# Altium PCB ChangingMelodiesShield.PcbDoc
Units mm, origin at the board's own origin, x right, y up, seen from the top; angles counter-clockwise.
Board outline 64.99 x 56 mm, 2 copper layers (Top Layer, Bottom Layer), stack 1.554 mm thick; 62 components, 58 nets, 212 pads, 51 vias.
Unrouted connection lines stored in the file: 1.
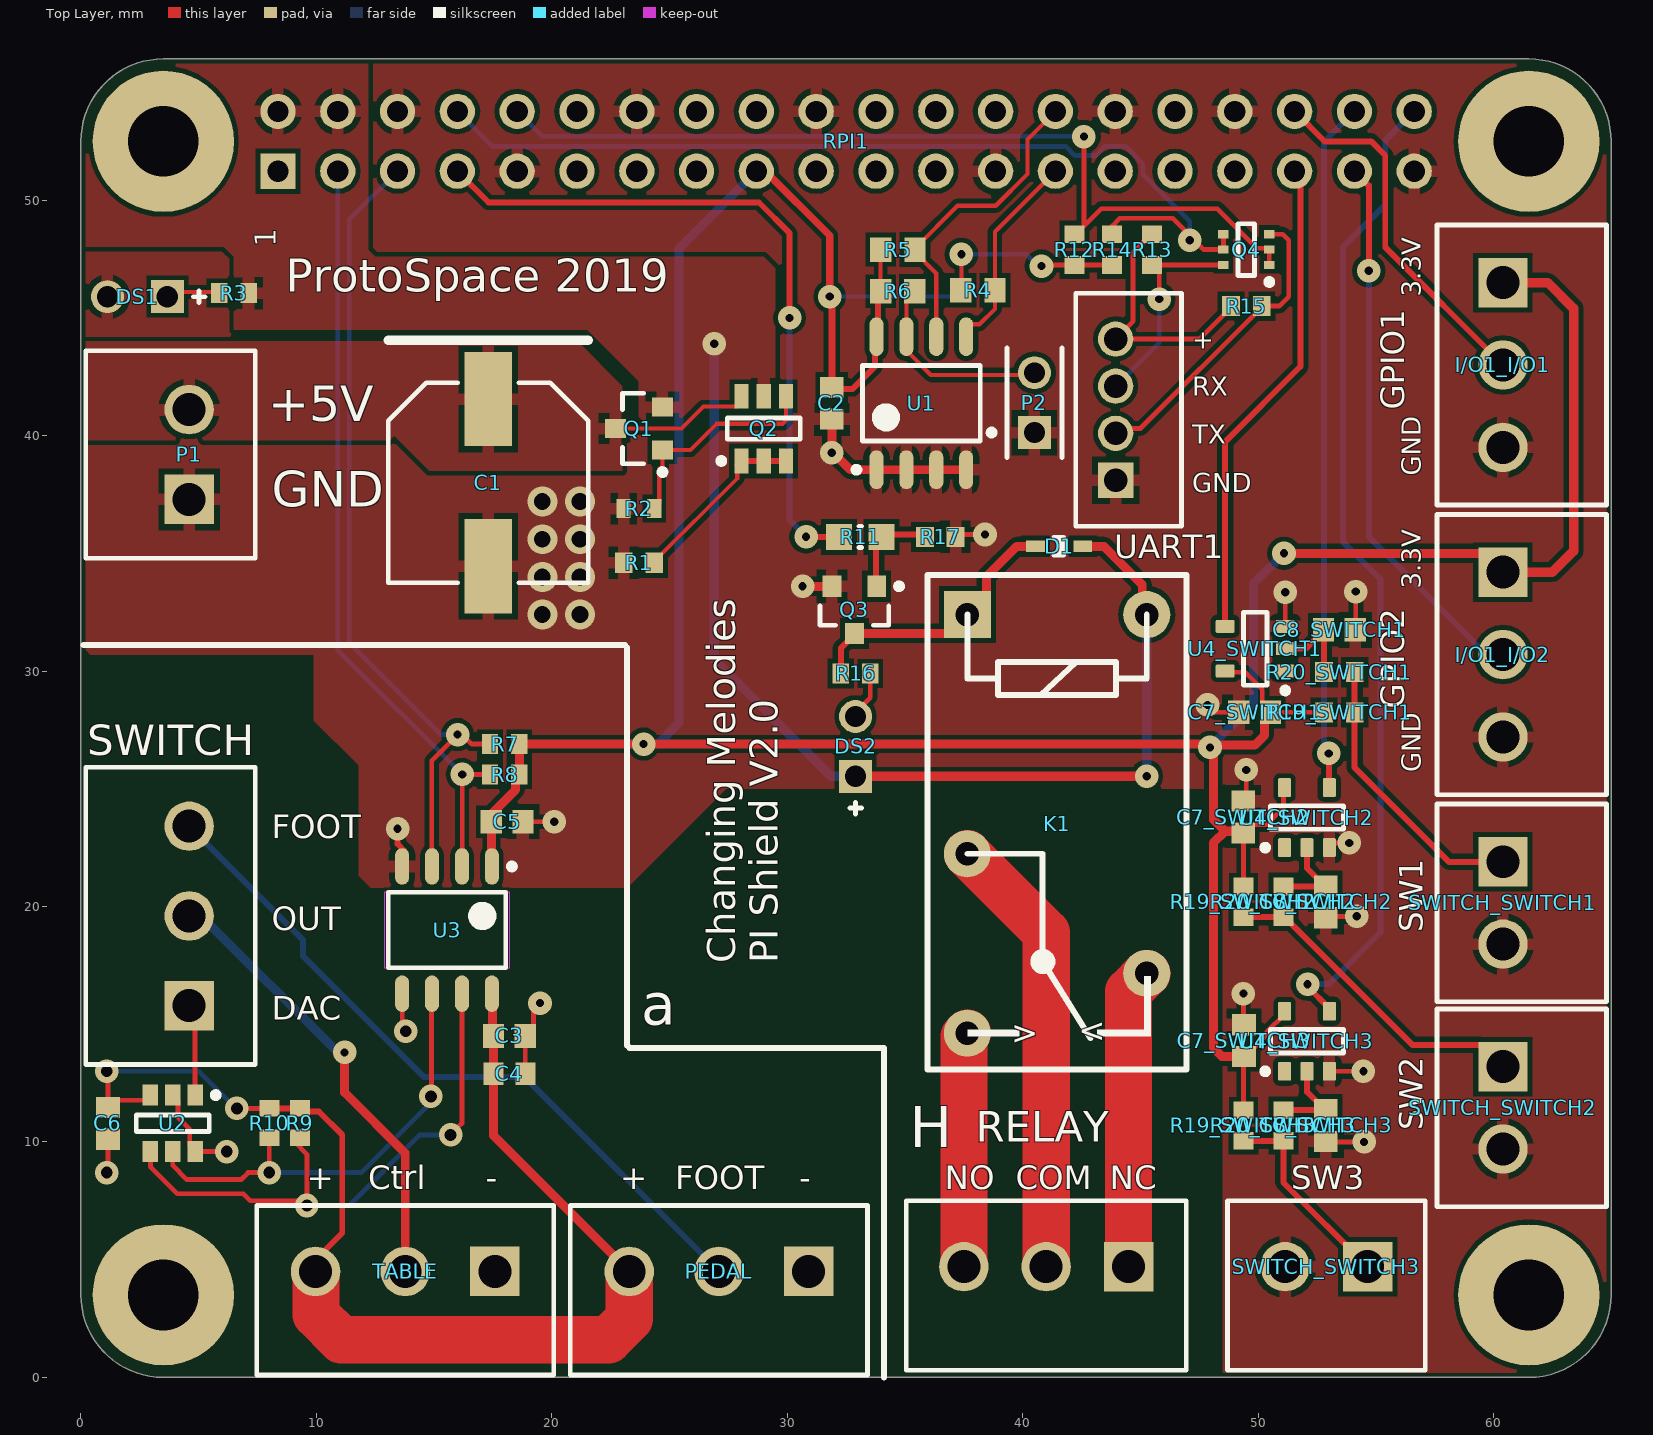
[diagram p0: Top Layer view]
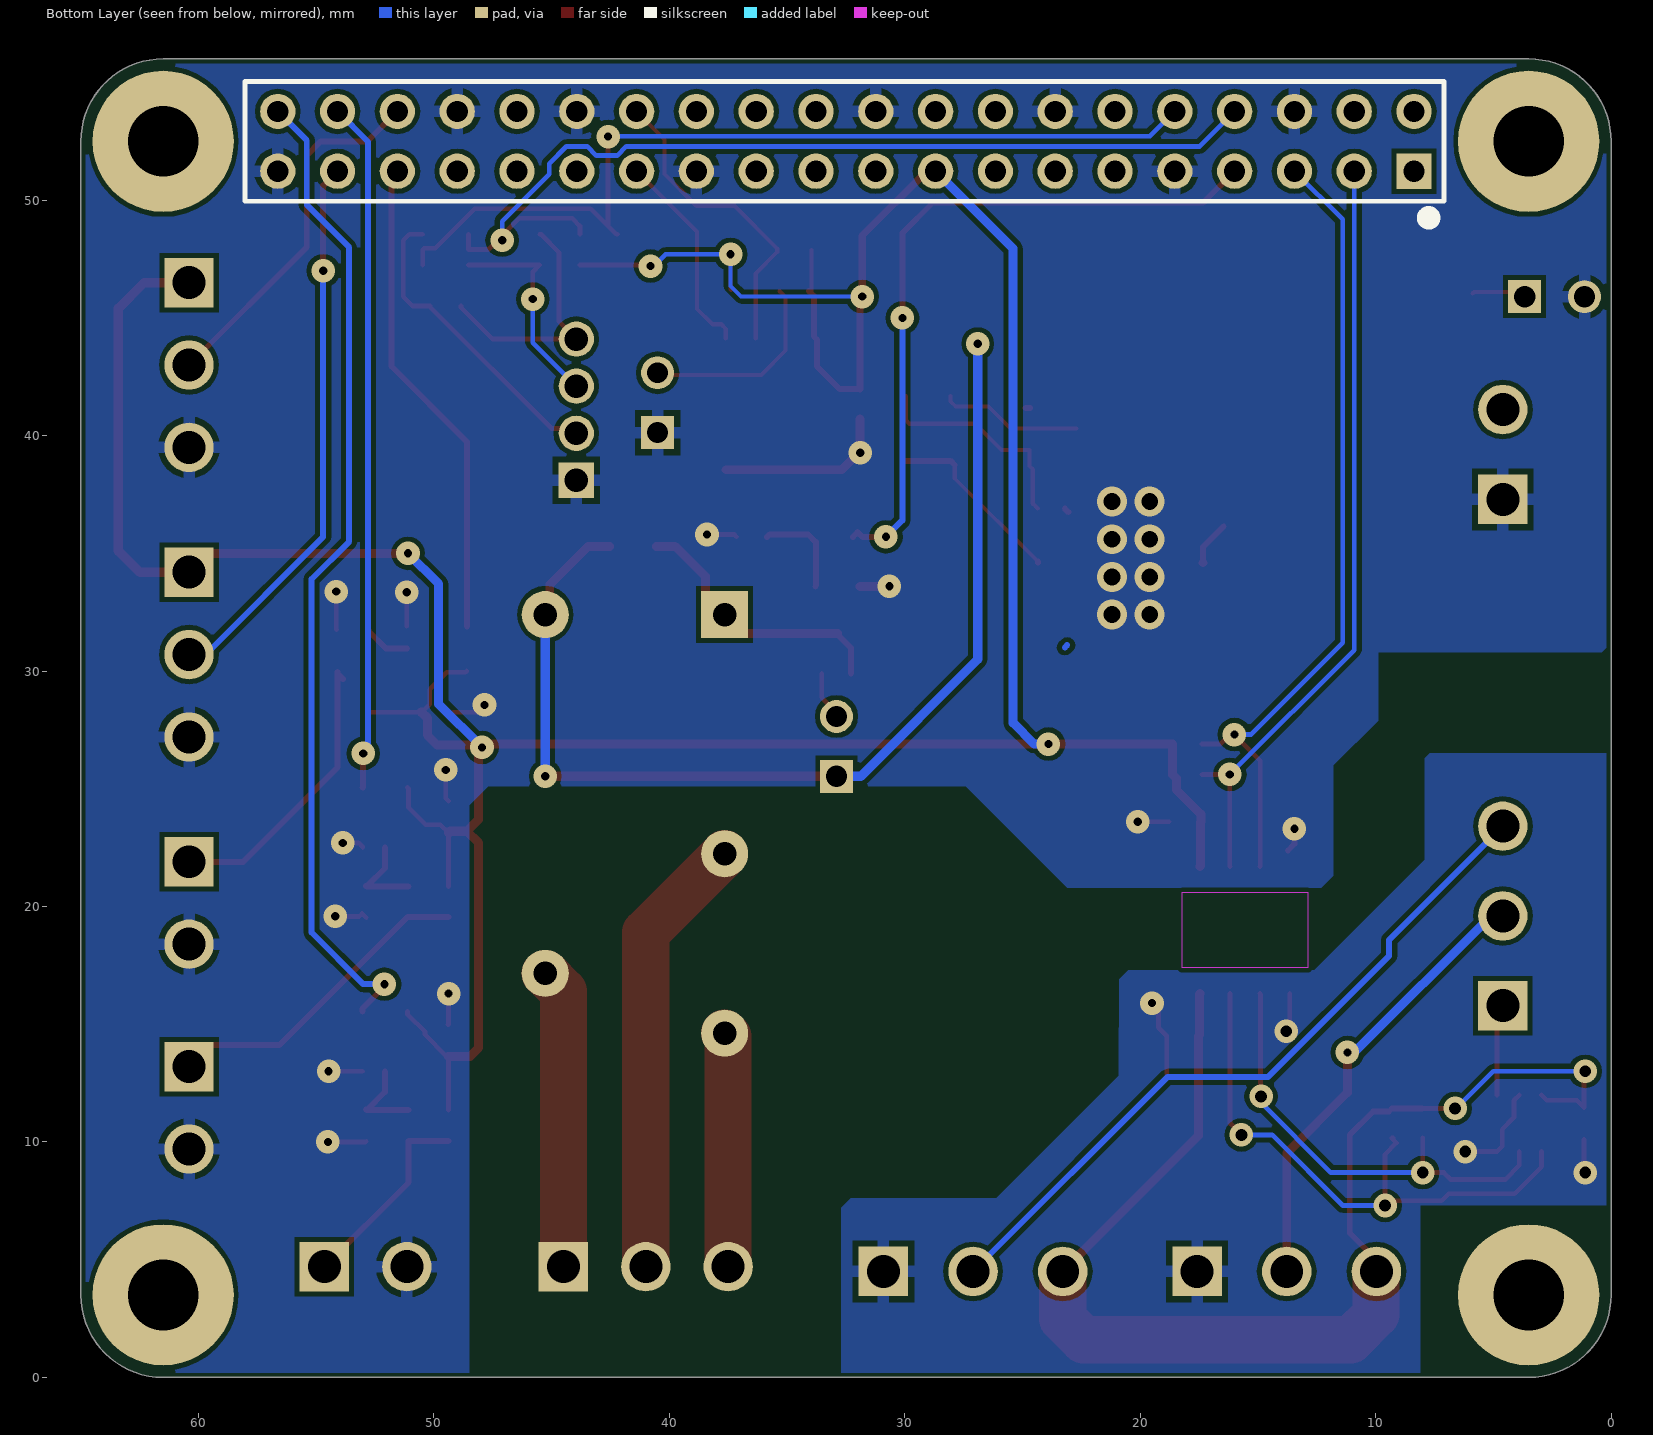
[diagram p1: Bottom Layer view, seen from below]

## Layer stack, top to bottom
Top Solder: solder mask 0.0203, Solder Resist, Dk 3.5
Top Layer: signal copper 0.0533
Dielectric 1: dielectric 1.4478, FR-4, Dk 4.6
Bottom Layer: signal copper 0.0533
Bottom Solder: solder mask 0.0203, Solder Resist, Dk 3.5

## Board outline
0,3.5 ccw(c3.5,3.5) 3.5,0 61.5,0 ccw(c61.496,3.496) 64.992,3.5 64.992,52.5 ccw(c61.496,52.504) 61.5,56 3.5,56 ccw(c3.5,52.5) 0,52.5

## Design rules (kind name [scope] priority, off if disabled: settings)
BoardOutlineClearance [All] p1: gap=0.2 ignorepadtopadclearanceinfootprint=FALSE except(0.4: Arc-SplitBarrior Arc-SplitContinuation Track-SplitBarrior Track-SplitContinuation SMDPad-SplitBarrior SMDPad-SplitContinuation THPad-SplitBarrior THPad-SplitContinuation Via-SplitBarrior Via-SplitContinuation Fill-SplitBarrior Fill-SplitContinuation Poly-SplitBarrior Poly-SplitContinuation Region-SplitBarrior Region-SplitContinuation Text-SplitBarrior Text-SplitContinuation)
Clearance "Clearance Bottom Layer" [OnLayer('Bottom Layer')] p1: gap=0.203 ignorepadtopadclearanceinfootprint=TRUE except(0.254: Arc-Text Track-Text SMDPad-Text THPad-Text Via-Text Fill-Text Poly-Text Region-Text Text-Text)
Clearance "Clearance Top Layer" [OnLayer('Top Layer')] p2: gap=0.203 ignorepadtopadclearanceinfootprint=TRUE except(0.254: Arc-Text Track-Text SMDPad-Text THPad-Text Via-Text Fill-Text Poly-Text Region-Text Text-Text)
Clearance [All] p3: gap=0.2 ignorepadtopadclearanceinfootprint=FALSE except(0.089: Arc-Arc Arc-Track Arc-SMDPad Track-Track Track-SMDPad SMDPad-SMDPad; 0.127: Arc-Via Track-Via SMDPad-Via THPad-Via Via-Via; 0.254: Arc-Text Track-Text SMDPad-Text THPad-Text Via-Text Fill-Text Poly-Text Region-Text Text-Text)
HoleSize [All] p1: absolutevalues=TRUE maxlimit=6.3 minlimit=0.2 maxpercent=80.000 minpercent=20.000
MinimumAnnularRing [All] p1: minimumring=0.076
MinimumSolderMaskSliver [All] p1: minsoldermaskwidth=0.1
PolygonConnect PolygonConnect_1 [All] p1: thpad.connectstyle=Relief thpad.reliefconductorwidth=0.508 thpad.reliefentries=4 thpad.polygonreliefangle="90 Angle" thpad.airgapwidth=0.254 smdpad.connectstyle=Relief smdpad.reliefconductorwidth=0.508 smdpad.reliefentries=4 smdpad.polygonreliefangle="90 Angle" smdpad.airgapwidth=0.254 via.connectstyle=Direct via.reliefconductorwidth=0.508 via.reliefentries=4 via.polygonreliefangle="90 Angle" via.airgapwidth=0.254
RoomDefinition I/O2 [InComponentClass('I/O2')] p1: confinementstyle=ConfineIn formatcopy=TRUE lockcomponents=FALSE outline 65.3,37.2 57.3,37.2 57.3,24.3 65.3,24.3
RoomDefinition I/O1 [InComponentClass('I/O1')] p2: confinementstyle=ConfineIn formatcopy=TRUE lockcomponents=FALSE outline 65.3,49.3 57.2,49.3 57.2,36.8 65.3,36.8
RoomDefinition SWITCH3 [InComponentClass('SWITCH3')] p3: confinementstyle=ConfineIn formatcopy=TRUE lockcomponents=FALSE outline 57.675,-0.08 57.675,18.6 48,18.6 48,0
RoomDefinition SWITCH1 [InComponentClass('SWITCH1')] p4: confinementstyle=ConfineIn formatcopy=TRUE lockcomponents=FALSE outline 65.1,34.2 47.7,34.2 47.7,15.7 65.1,15.7
RoomDefinition SWITCH2 [InComponentClass('SWITCH2')] p5: confinementstyle=ConfineIn formatcopy=TRUE lockcomponents=FALSE outline 65.1,7 65.1,26.9 47.975,26.9 47.975,7
RoomDefinition U_UART [InComponentClass('U_UART')] p6: confinementstyle=ConfineIn formatcopy=TRUE lockcomponents=FALSE outline 41.1,34.2 57,34.2 57,49.7 41.1,49.7
RoomDefinition "U_Relay Output" [InComponentClass('U_Relay Output')] p7: confinementstyle=ConfineIn formatcopy=TRUE lockcomponents=FALSE outline 30.6,0 47.65,0 47.65,36.8 30.6,36.8
RoomDefinition "U_Isolated DAC" [InComponentClass('U_Isolated DAC')] p8: confinementstyle=ConfineIn formatcopy=TRUE lockcomponents=FALSE outline 33.9,31.2 33.9,-0.1 0,-0.1 0,31.2
RoomDefinition "U_Output terminals" [InComponentClass('U_Output terminals')] p9 off: confinementstyle=ConfineOut formatcopy=TRUE lockcomponents=FALSE outline -0.3,72.9 31.7,72.9 31.7,80.8 -0.3,80.8
RoomDefinition "U_RPI 3 Backpower" [InComponentClass('U_RPI 3 Backpower')] p10: confinementstyle=ConfineIn formatcopy=TRUE lockcomponents=FALSE outline -0.1,31.5 30.9,31.5 30.9,48.1 -0.1,48.1
RoomDefinition "U_RPI Hat ID" [InComponentClass('U_RPI Hat ID')] p11: confinementstyle=ConfineIn formatcopy=TRUE lockcomponents=FALSE outline 42.795,36.985 42.795,49.575 31.095,49.575 31.095,36.985
RoomDefinition "U_RPI 3" [InComponentClass('U_RPI 3')] p12: confinementstyle=ConfineIn formatcopy=TRUE lockcomponents=FALSE outline 6.8,49.7 58.3,49.7 58.3,55.4 6.8,55.4
RoutingCorners [All] p1: cornerstyle=Round minsetback=2.54 maxsetback=2.54
RoutingTopology "GND Topology" [InNetClass('GND')] p1: topology=Starburst
RoutingTopology [All] p2: topology=Shortest
RoutingVias [All] p1: holewidth=0.5 width=1 viastyle="Through Hole" minholewidth=0.2 minwidth=0.45 maxholewidth=1 maxwidth=2
SilkToSilkClearance [All] p1: silktosilkclearance=0.1
SilkToSolderMaskClearance [IsPad] p1: minsilkscreentomaskgap=0.1 clearancetoexposedcopper=TRUE
SolderMaskExpansion [All] p1: expansion=0.102
Width [All] p1: maxlimit=2.54 minlimit=0.089 preferedwidth=0.381
24 further rules are at their usual default settings.

## Classes and differential pairs
channel class GPIO: I/O1 I/O2
net class I/O[1..2]: I/O1 I/O2
component class I/O2: I/O1_I/O2
component class I/O1: I/O1_I/O1
net class SWITCH[1..3]: SWITCH1 SWITCH2 SWITCH3
channel class Switch: SWITCH1 SWITCH2 SWITCH3
component class SWITCH3: C7_SWITCH3 C8_SWITCH3 R19_SWITCH3 R20_SWITCH3 SWITCH_SWITCH3 U4_SWITCH3
component class SWITCH2: C7_SWITCH2 C8_SWITCH2 R19_SWITCH2 R20_SWITCH2 SWITCH_SWITCH2 U4_SWITCH2
component class SWITCH1: C7_SWITCH1 C8_SWITCH1 R19_SWITCH1 R20_SWITCH1 SWITCH_SWITCH1 U4_SWITCH1
component class U_UART: Q4 R12 R13 R14 R15
component class "U_Relay Output": D1 DS2 K1 Q3 R11 R16 R17
component class "U_Output terminals": PEDAL RELAY SWITCH TABLE UART1
component class "U_RPI 3 Backpower": C1 DS1 P1 Q1 Q2 R1 R2 R3
component class "U_Isolated DAC": C3 C4 C5 C6 R7 R8 R9 R10 U2 U3
component class "U_RPI Hat ID": C2 P2 prog R4 R5 R6 U1
component class "U_RPI 3": RPI1

## Components (designator, comment, footprint, x,y, rotation, side; value= is the part's Value field where it differs from the comment)
C1 "EEEFK1C471P" PNSC-FK-V-F_V 17.3,38 r270 top
C2 "0.1uF" CAPC1608X87X35NL15T15 31.895,41.375 r270 top
C3 "0.1uF" CAPC1608X87X35NL15T15 18.2,14.5 r0 top
C4 "10uF" CAPC1608X90X35NL10T15 18.2,12.9 r180 top
C5 "0.1uF" CAPC1608X87X35NL15T15 18.1,23.6 r0 top
C6 "0.1uF" CAPC1608X87X35NL15T15 1.15,10.79 r270 top
C7_SWITCH1 "0.1uF" CAPC1608X87X35NL15T15 49.85,28.25 r180 top (schematic designator C7)
C7_SWITCH2 "0.1uF" CAPC1608X87X35NL15T15 49.375,23.8 r90 top (schematic designator C7)
C7_SWITCH3 "0.1uF" CAPC1608X87X35NL15T15 49.4,14.3 r90 top (schematic designator C7)
C8_SWITCH1 "0.1uF" CAPC1608X87X35NL15T15 53.45,31.75 r0 top (schematic designator C8)
C8_SWITCH2 "0.1uF" CAPC1608X87X35NL15T15 52.875,20.2 r270 top (schematic designator C8)
C8_SWITCH3 "0.1uF" CAPC1608X87X35NL15T15 52.875,10.7 r270 top (schematic designator C8)
D1 "1N4148WT" FAIR-SOD-523F-2_V 41.55,35.3 r180 top
DS1 "LTL-1CHG" LTST-LTL-1CHG-2 2.4,45.9 r180 top
DS2 "LTL-1CHG" LTST-LTL-1CHG-2 32.9,26.8 r90 top
I/O1_I/O1 "691321100003" 691321100003 61.2,43 r270 top (schematic designator I/O1)
I/O1_I/O2 "691321100003" 691321100003 61.2,30.7 r270 top (schematic designator I/O1)
K1 "G5Q1EU5DC" G5Q1EU5DC 37.65,32.4 r180 top
P1 "691321300002" 691321300002 3.8,39.2 r90 top
P2 "5-146280-2" TECO-5-146280-2_V 40.5,41.4 r90 top
PEDAL "691321300003" 691321300003 27.1,3.7 r180 top
Q1 "DMG2305UX-7" DIOD-SOT23-3_A_V 23.7,40.3 r180 top
Q2 "DMMT5401-7-F" DIOD-SOT-26-6_N 29,40.3 r90 top
Q3 "BC848ALT1G" ONSC-SOT-23-3-318-08_V 32.85,32.6 r270 top
Q4 "BSS138BKS,115" NXP-SOT363_L 49.5,47.9 r180 top
R1 "10k" RESC1609X55X30LL15T15 23.7,34.6 r0 top
R2 "47k" RESC1608X55X25LL10T15 23.7,36.9 r0 top
R3 "1K" RESC1608X55X30LL15T15 6.5,46.05 r0 top
R4 "3.9K" RESC1608X55X30ML15T15 38.095,46.175 r180 top
R5 "3.9K" RESC1608X55X30ML15T15 34.7,47.9 r180 top
R6 "1K" RESC1608X55X30ML15T15 34.695,46.135 r180 top
R7 "1K" RESC1608X55X30LL15T15 18,26.9 r0 top
R8 "1K" RESC1608X55X30LL15T15 18,25.6 r0 top
R9 "1K" RESC1608X55X30LL15T15 9.3,10.8 r90 top
R10 "1K" RESC1608X55X30LL15T15 8,10.8 r90 top
R11 "470R" RESC0603(1608)_M 33.1,35.7 r0 top value="470.00 Ohm"
R12 "10k" RESC1609X55X30LL15T15 42.2,47.9 r270 top
R13 "10k" RESC1609X55X30LL15T15 45.5,47.9 r270 top
R14 "10k" RESC1609X55X30LL15T15 43.8,47.9 r270 top
R15 "10k" RESC1609X55X30LL15T15 49.5,45.5 r180 top
R16 "1K" RESC1608X55X30LL15T15 32.9,29.9 r0 top
R17 "10k" RESC1609X55X30LL15T15 36.5,35.7 r180 top
R19_SWITCH1 "10k" RESC1609X55X30LL15T15 53.45,28.25 r180 top (schematic designator R19)
R19_SWITCH2 "10k" RESC1609X55X30LL15T15 49.375,20.2 r90 top (schematic designator R19)
R19_SWITCH3 "10k" RESC1609X55X30LL15T15 49.375,10.7 r90 top (schematic designator R19)
R20_SWITCH1 "10k" RESC1609X55X30LL15T15 53.45,29.95 r0 top (schematic designator R20)
R20_SWITCH2 "10k" RESC1609X55X30LL15T15 51.075,20.2 r270 top (schematic designator R20)
R20_SWITCH3 "10k" RESC1609X55X30LL15T15 51.075,10.7 r270 top (schematic designator R20)
RELAY "691321100003" 691321100003 41,3.9 r180 top
RPI1 "RPI GPIO Connector" RPI 32.5,52.5 r180 top locked
SWITCH "691321300003" 691321300003 3.8,19.6 r90 top
SWITCH_SWITCH1 "691321100003" 691321100002 61.2,20.15 r270 top (schematic designator SWITCH)
SWITCH_SWITCH2 "691321100003" 691321100002 61.2,11.45 r270 top (schematic designator SWITCH)
SWITCH_SWITCH3 "691321100003" 691321100002 52.9,3.9 r180 top (schematic designator SWITCH)
TABLE "691321300003" 691321300003 13.776,3.7 r180 top
U1 "M24C02-WMN6TP" STM-M24C02-WMN6TP-8_M 35.695,41.375 r90 top
U2 "MCP4725A0T-E/CH" SOT-23-CH6_L 3.9,10.79 r270 top
U3 "ISO1540DR" "ISO1540DR SOIC127P600X175-8N" 15.55,19 r270 top
U4_SWITCH1 "SN74AHC1G14DBVR" DBV0005A_L 49.875,30.95 r180 top (schematic designator U4)
U4_SWITCH2 "SN74AHC1G14DBVR" DBV0005A_L 52.075,23.775 r90 top (schematic designator U4)
U4_SWITCH3 "SN74AHC1G14DBVR" DBV0005A_L 52.075,14.275 r90 top (schematic designator U4)
UART1 "B4B-PH-K-S(LF)(SN)" JST-B4B-PH-K-S_V 44.5,41.1 r90 top

## Footprints (in the part's own frame and the unit in brackets; to place one, negate y for a bottom-side part, rotate by r counter-clockwise, add the part's x,y. Pads: shape width x height; smd on the part's side, far side on the other; paste and mask are expansions set on the pad)
691321100002 [mm] "Vertical PCB Header, pitch 3.5mm, 02p"
  rect 2.1x2.1 hole 1.4: 1(-1.75,-0.8)
  round 2.1 hole 1.4: 2(1.75,-0.8)
  silkscreen extent -4.2,-3.6 4.2,3.6, body extent -4.2,-3.6 4.2,3.6, height 9.3
691321100003 [mm] "Vertical PCB Header, pitch 3.5mm, 03p"
  rect 2.1x2.1 hole 1.4: 1(-3.5,-0.8)
  round 2.1 hole 1.4: 2(0,-0.8) 3(3.5,-0.8)
  silkscreen extent -5.95,-3.6 5.95,3.6, body extent -5.95,-3.6 5.95,3.6, height 9.3
691321300002 [mm] "Vertical PCB Header, pitch 3.81mm, 02p"
  rect 2.1x2.1 hole 1.4: 1(-1.905,-0.8)
  round 2.1 hole 1.4: 2(1.905,-0.8)
  silkscreen extent -4.4,-3.6 4.41,3.6, body extent -4.4,-3.6 4.41,3.6, height 9.25
691321300003 [mm] "Vertical PCB Header, pitch 3.81mm, 03p"
  rect 2.1x2.1 hole 1.4: 1(-3.81,-0.8)
  round 2.1 hole 1.4: 2(0,-0.8) 3(3.81,-0.8)
  silkscreen extent -6.31,-3.6 6.31,3.6, body extent -6.31,-3.6 6.31,3.6, height 9.25
CAPC1608X87X35NL15T15 [mm] "Chip Capacitor, 2-Leads, Body 1.60x0.80mm, IPC Medium Density"
  rect 0.9x1 smd: 1(-0.675,0) 2(0.675,0)
  body extent -0.87,-0.48 0.87,0.47, height 0.87
CAPC1608X90X35NL10T15 [mm] "Chip Capacitor, 2-Leads, Body 1.60x0.80mm, IPC Medium Density"
  rect 0.85x0.95 smd: 1(-0.675,0) 2(0.675,0)
  body extent -0.85,-0.45 0.85,0.45, height 0.9
DBV0005A_L [mm] "SOT23, 5-Leads, Body 3.05x1.75mm, Pitch 0.95mm, IPC High Density"
  rrect18% 0.8x0.55 smd: 1(-1.275,0.95) 2(-1.275,0) 3(-1.275,-0.95) 4(1.275,-0.95) 5(1.275,0.95)
  silkscreen extent -1.4,-1.55 0.5,1.9, body extent -1.42,-1.46 1.42,1.46, height 1.08
DIOD-SOT23-3_A_V [mm] "SOT23, 3-Leads, Body 3x1.40mm, Pitch 0.915mm"
  rect 0.9x0.8 smd: 1(-1,0.915) 2(-1,-0.915) 3(1,0)
  silkscreen extent -1.13,-1.5 0.7,1.97, body extent -1.25,-1.5 1.25,1.5, height 1.1
DIOD-SOT-26-6_N [mm] "SOT23, 6-Leads, Body 3.1x1.7mm, Pitch 0.95mm, IPC Medium Density"
  rect 1.05x0.6 smd: 1(-1.375,0.95) 2(-1.375,0) 3(-1.375,-0.95) 4(1.375,-0.95) 5(1.375,0) 6(1.375,0.95)
  silkscreen extent -1.5,-1.55 0.45,1.92, body extent -1.5,-1.55 1.5,1.55, height 1.36
FAIR-SOD-523F-2_V [mm] "SMD, 2-Leads, Body 1.2x0.8mm, Height 0.7mm"
  rect 0.8x0.5 smd: 1(-1,0) 2(1,0)
  silkscreen extent -0.2,-0.38 0.24,0.38, body extent -0.6,-0.4 0.6,0.4, height 0.71
G5Q1EU5DC [mm] "OMRON - G5Q-1EU 5DC - RELAY, SPDT, 250VAC, 30VDC, 10A"
  rect 2x2 hole 1: 1(0,0)
  round 2 hole 1: 2(0,10.16) 3(0,17.78) 4(-7.62,15.24) 5(-7.62,0)
  silkscreen extent -9.31,-1.68 1.69,19.32, body extent -8.81,-1.18 1.19,18.82, height 16.2
"ISO1540DR SOIC127P600X175-8N" [mm] "SOIC, 8-Leads, Body 4,91x3,90mm, Pitch 1,27mm, IPC Medium Density"
  oval 1.55x0.6 smd: 1(-2.7,1.905) 2(-2.7,0.635) 3(-2.7,-0.635) 4(-2.7,-1.905) 5(2.7,-1.905) 6(2.7,-0.635) 7(2.7,0.635) 8(2.7,1.905)
  Top Layer keep-out region: -1.6,-2.667 1.6,-2.667 1.6,2.667 -1.6,2.667
  Bottom Layer keep-out region: -1.6,-2.667 1.6,-2.667 1.6,2.667 -1.6,2.667
  silkscreen extent -2.82,-2.5 1.6,2.88, body extent -3,-2.5 3,2.5, height 1.75
JST-B4B-PH-K-S_V [mm] "Connector, 4-Leads, Body 9.9x4.5mm, Pitch 2mm"
  rect 1.5x1.5 hole 1: 1(-3,0.55)
  round 1.5 hole 1: 2(-1,0.55) 3(1,0.55) 4(3,0.55)
  silkscreen extent -4.95,-2.25 4.95,2.25, body extent -4.95,-2.25 4.95,2.25, height 6
LTST-LTL-1CHG-2 [mm] "TH, 2-Leads, Dia 3.8mm"
  rect 1.4x1.4 hole 0.9: 1(-1.27,0)
  round 1.4 hole 0.9: 2(1.27,0)
  silkscreen extent -2.87,-0.25 -2.37,0.25, body extent -1.9,-1.9 1.9,1.9, height 6.5
NXP-SOT363_L [mm] "SOT23, 6-Leads, Body 2.2x1.35mm, Pitch 0.65mm, IPC High Density"
  rect 0.45x0.35 smd: 1(-0.975,0.65) 2(-0.975,0) 3(-0.975,-0.65) 4(0.975,-0.65) 5(0.975,0) 6(0.975,0.65)
  silkscreen extent -1.1,-1.1 0.35,1.5, body extent -0.67,-1.1 0.67,1.1, height 1.1
ONSC-SOT-23-3-318-08_V [mm] "SOT23, 3-Leads, Body 2.92x1.3mm, Pitch 0.95mm"
  rect 0.9x0.8 smd: 1(-1,0.95) 2(-1,-0.95) 3(1,0)
  silkscreen extent -1.12,-1.46 0.65,2.03, body extent -0.65,-1.46 0.65,1.46, height 1.11
PNSC-FK-V-F_V [mm] "CAPAE, 2-Leads, Body 8.50x8.50mm"
  rect 4x2 smd: 1(-3.55,0) 2(3.55,0)
  silkscreen extent -6.05,-4.25 4.25,4.25, body extent -5,-4.25 5,4.25, height 10.5
RESC0603(1608)_M [mm] "Chip Resistor, Body 1.6x0.8mm, IPC Low Density"
  rect 1.1x1.1 smd: 1(-0.9,0) 2(0.9,0)
  silkscreen extent -0.05,-0.45 0.05,0.45, body extent -0.85,-0.47 0.85,0.47, height 0.6
RESC1608X55X25LL10T15 [mm] "Chip Resistor, 2-Leads, Body 1.60x0.80mm, IPC High Density"
  rect 0.6x0.8 smd: 1(-0.65,0) 2(0.65,0)
  body extent -0.85,-0.45 0.85,0.45, height 0.55
RESC1608X55X30LL15T15 [mm] "Chip Resistor, 2-Leads, Body 1.60x0.80mm, IPC High Density"
  rect 0.7x0.85 smd: 1(-0.625,0) 2(0.625,0)
  body extent -0.87,-0.48 0.87,0.48, height 0.55
RESC1608X55X30ML15T15 [mm] "Chip Resistor, 2-Leads, Body 1.60x0.80mm, IPC Low Density"
  rect 0.9x1.05 smd: 1(-0.725,0) 2(0.725,0)
  body extent -0.87,-0.48 0.87,0.48, height 0.55
RESC1609X55X30LL15T15 [mm] "Chip Resistor, 2-Leads, Body 1.75x0.95mm, IPC High Density"
  rect 0.75x0.85 smd: 1(-0.65,0) 2(0.65,0)
  body extent -0.87,-0.48 0.87,0.48, height 0.55
RPI [mm]
  rect 1.5x1.5 hole 0.9: 1(24.13,1.27)
  round 1.5 hole 0.9: 2(24.13,-1.27) 3(21.59,1.27) 4(21.59,-1.27) 5(19.05,1.27) 6(19.05,-1.27) 7(16.51,1.27) 8(16.51,-1.27) 9(13.97,1.27) 10(13.97,-1.27) 11(11.43,1.27) 12(11.43,-1.27) 13(8.89,1.27) 14(8.89,-1.27) 15(6.35,1.27) 16(6.35,-1.27) 17(3.81,1.27) 18(3.81,-1.27) 19(1.27,1.27) 20(1.27,-1.27) 21(-1.27,1.27) 22(-1.27,-1.27) 23(-3.81,1.27) 24(-3.81,-1.27) 25(-6.35,1.27) 26(-6.35,-1.27) 27(-8.89,1.27) 28(-8.89,-1.27) 29(-11.43,1.27) 30(-11.43,-1.27) 31(-13.97,1.27) 32(-13.97,-1.27) 33(-16.51,1.27) 34(-16.51,-1.27) 35(-19.05,1.27) 36(-19.05,-1.27) 37(-21.59,1.27) 38(-21.59,-1.27) 39(-24.13,1.27) 40(-24.13,-1.27)
  body extent -25.52,-2.63 25.53,2.38, height 8.5
SOT-23-CH6_L [mm] "SOT23, 6-Leads, Body 2.9x1.7mm, Pitch 0.95mm, Lead Span 2.8mm, IPC High Density"
  rect 0.9x0.65 smd: 1(-1.2,0.95) 2(-1.2,0) 3(-1.2,-0.95) 4(1.2,-0.95) 5(1.2,0) 6(1.2,0.95)
  silkscreen extent -1.32,-1.55 0.35,1.95, body extent -0.9,-1.55 0.9,1.55, height 1.45
STM-M24C02-WMN6TP-8_M [mm] "SOIC, 8-Leads, Body 5x4mm, Pitch 1.27mm, IPC Low Density"
  oval 1.65x0.6 smd: 1(-2.825,1.905) 2(-2.825,0.635) 3(-2.825,-0.635) 4(-2.825,-1.905) 5(2.825,-1.905) 6(2.825,-0.635) 7(2.825,0.635) 8(2.825,1.905)
  silkscreen extent -2.95,-2.5 1.6,2.88, body extent -2,-2.5 2,2.5, height 1.75
TECO-5-146280-2_V [mm] "Connector, 2-Leads, Body 4.67x2.34mm, Pitch 2.54mm"
  rect 1.4x1.4 hole 0.89: 1(-1.27,0)
  round 1.4 hole 0.89: 2(1.27,0)
  silkscreen extent -2.33,-1.17 2.33,1.94, body extent -2.34,-1.17 2.34,1.17, height 5.33

## Part data
C1: library part CMP-2000-06204-1, "Aluminum Electrolytic Capacitor, 470 uF, +/- 20%, 16 V, 2-Pin SMD (Size Code F), -55 to 105 degC, RoHS, Tape and Reel", Capacitance=470µF, Case Size/Dimension=Ø8x10.2mm, Lifetime@Temperature=2000Hrs@105°C, Manufacturer=Panasonic, Operating Temp-Max=105°C, Operating Temp Range=-55to+105°C, Package Description="2-Pin Electrolytic Aluminum Capacitor, Body 8.3 x 8.3 mm", Package Reference=FK-V-F, Rated Voltage=16V, Ripple Current=600mA, Datasheet URL=http://industrial.panasonic.com/cdbs/www-data/pdf/RDE0000/ABA0000C1181.pdf, Datasheet Version=03/2016, Impedance=0.16O, Manufacturer URL=http://www.panasonic.com/, Mounting Technology=SurfaceMount, Package URL=http://industrial.panasonic.com/cdbs/www-data/pdf/RDE0000/DME0000COL48.pdf, Series=FK, Type=Can
C2 C3 C5 C6 C7_SWITCH1 C7_SWITCH2 C7_SWITCH3 C8_SWITCH1 C8_SWITCH2 C8_SWITCH3: library part CMP-2006-03300-1, Manufacturer=Kemet, Part Number=C0603X104K5RACTU
C4: library part CMP-2006-02792-1, Manufacturer=Murata, Part Number=GRM188R60J106ME47D
D1: library part CMP-0881-00001-1, "High Conductance Fast Switching Diode, 75 V, -55 to 150 degC, 2-Pin SOD523F, RoHS", Manufacturer="Fairchild Semiconductor", Temperature Range="-55 to 150 degC", BVR (IR="5 uA)=75 V Min.", CO="4 pF Max.", ComponentLink1Description="Manufacturer URL", ComponentLink1URL=http://www.fairchildsemi.com/, ComponentLink2Description=Datasheet, ComponentLink2URL=http://www.fairchildsemi.com/ds/1N/1N4148WT.pdf, DatasheetVersion="Rev. A2", IR (VR="75 V)=5 uA Max.", Mounting Technology="Surface Mount", PackageDescription="2-Pin Surface Mount Device, Body 1.2 x 0.8 mm, Height 0.7 mm", PackageReference=SOD-523F-2, PartNumber=1N4148WT, RoHS=TRUE, VF="1 V Max."
DS1 DS2: library part CMP-1674-00014-1, "LITE-ON Electronic, INC, 120 mA, 100 mW, 5 V, -55 to 100 degC, 2-Pin THD, RoHS, Bulk", Case\Package=QFN, Max Operating Temperature="85 degC", Max Supply Voltage="3.6 V", Min Operating Temperature="-40 degC", Min Supply Voltage="2.5 V", Package Quantity=5000, ComponentLink1Description="Manufacturer URL", ComponentLink1URL=http://www.us.liteon.com/, ComponentLink2Description=Datasheet, ComponentLink2URL=http://datasheet.octopart.com/LTL-1CHG-Lite-On-datasheet-143841.pdf, DatasheetVersion=Mar-00, Interface=I2C, PackageDescription="2-Pin Through Hole Device, Dia 3.8 mm", PackageReference=LTL-1CHG, Packaging="Cut Tape", Pins=24, REACH SVHC="No SVHC", RoHSCompliant=true
I/O1_I/O1 I/O1_I/O2 RELAY: library part CMP-1502-01784-1, "Serie 3211 - 3.50mm Vertical PCB Header WR-TBL, 3 pin", Manufacturer="Wurth Elektronik", Operating Temperature=-40to105degC, Datasheet URL=http://katalog.we-online.de/em/datasheet/6913211000xx.pdf, Gender=Male, Manufacturer URL=http://www.we-online.de, Mounting Technology=THT, Package Reference=691321100003, Packaging=Box, Part Number=691321100003, Pin Number=3, Pitch=3.50mm, Publisher=WurthElektronik
K1: "OMRON - G5Q-1EU 5DC - RELAY, SPDT, 250VAC, 30VDC, 10A", Coil Current=80mA, Coil Resistance=63R, Coil Voltage (DC)=5V, Contact Current Rating=10A, Manufacturer 1=Omron, Max Operating Temperature=85°C, Min Operating Temperature=-40°C, Ratings=IP67, Supplier Part Number 1=11072346, Switching Capacity=1.25kW, Voltage Rating (AC)=277V, Coil Type=Non-Latching, ComponentLink1Description=https://datasheet.ciiva.com/29336/503930-da-01-en-kompaktes-pcb-powerrelais-g5q-1-eu-5dc-29336254.pdf?src-supplier=Conrad, ComponentLink1URL=https://datasheet.ciiva.com/29336/503930-da-01-en-kompaktes-pcb-powerrelais-g5q-1-eu-5dc-29336254.pdf?src-supplier=Conrad, ComponentLink2Description=https://datasheet.ciiva.com/26311/g5q-eng-26311244.pdf?src-supplier=Distrelec, ComponentLink2URL=https://datasheet.ciiva.com/26311/g5q-eng-26311244.pdf?src-supplier=Distrelec, Contact Material=Silver, Depth=10.3mm, Height=15.8mm, Length=20.3mm, Manufacturer Part Number 1=G5Q1EU5DC, Mount=PCB, Number of Pins=5, Operate Time=10ms, Pricing 1="10=1,55000, 50=1,31000 (EUR)", REACH SVHC=Unknown, RoHS=Yes, Stock 1=8265, Supplier 1=Distrelec, Switching Current=10A, Termination="PC Pin", Throw Configuration=SPDT, Width=10.3mm
P1: library part CMP-1502-01863-1, "Serie 321 - 3.81mm Vertical PCB Header WR-TBL, 2 pin", Manufacturer="Wurth Elektronik", Operating Temperature=-40to105degC, Datasheet URL=http://katalog.we-online.de/em/datasheet/6913213000xx.pdf, Gender=Male, Manufacturer URL=http://www.we-online.de, Mounting Technology=THT, Package Reference=691321300002, Packaging=Box, Part Number=691321300002, Pin Number=2, Pitch=3.81mm, Publisher=WurthElektronik
P2: library part CMP-2000-07492-1, "Male Header, Pitch 2.54 mm, 1 x 2 Position, Height 8.21 mm, Tail Length 3.05 mm, -65 to 105 degC, RoHS, Bulk", Case\/Package=100, Colour=Black, Current Rating=3A, Flammability Rating=UL94V-0, High Temperature Housing=Yes, Manufacturer="TE Connectivity", Max Current Rating=5A, Max Operating Temperature=105degC, Min Operating Temperature=-65degC, Package Description="Male Header, Pitch 2.54 mm, 1 x 2 Position, Height 8.21 mm, Tail Length 3.05 mm", Package Quantity=500, Approvals=CSA, Board Standoff=No(Without), Connector Type=Header, Contact Gender=Male, Contact Material=CopperAlloy, Contact Mating Length=0.23inch, Contact Plating=Matte, Contact Protection=No(Without), Contact Shape=Square, Datasheet URL=http://www.te.com/commerce/DocumentDelivery/DDEController?Action=showdoc&DocId=Customer+Drawing%7F146280%7FH1%7Fpdf%7FEnglish%7FENG_CD_146280_H1.pdf%7F5-146280-2, Datasheet Version="Rev. H1, 08/2016", Depth=2.34mm, Gasket=No(Without), High Speed Serial Data Connector=No, Housing Colour=Black, Housing Material=Polymer, Keyed=No, Length=4.67mm, Manufacturer URL=http://www.te.com/, Mating Alignment=No(Without), Mating Connector Lock=No(Without), Mating Post Length=0.23inch, Mount=ThroughHole, Mounting Technology=ThroughHole, Number of Contacts=2, Number of Positions=2, Number of Rows=1, Orientation=Straight, Package Reference=5-146280-2, Packaging=Carton, Panel Mount Retention=No(Without), PCB Mounting Orientation=Vertical, PCB Mount Retention=Without, PCB Thickness=0.063inch, Pitch=2.54mm, Radiation Hardening=No, RoHSCompliant=true, Row Spacing=2.54mm, Selectively Loaded=No(Without), Stabilizers=No(Without), Termination=ThroughHole, Termination Post Length=0.12inch
PEDAL SWITCH TABLE: library part CMP-1502-01864-1, "Serie 321 - 3.81mm Vertical PCB Header WR-TBL, 3 pin", Manufacturer="Wurth Elektronik", Operating Temperature=-40to105degC, Datasheet URL=http://katalog.we-online.de/em/datasheet/6913213000xx.pdf, Gender=Male, Manufacturer URL=http://www.we-online.de, Mounting Technology=THT, Package Reference=691321300003, Packaging=Box, Part Number=691321300003, Pin Number=3, Pitch=3.81mm, Publisher=WurthElektronik
Q1: library part CMP-1693-00002-3, "P-Channel Enhancement Mode MOSFET, 20 V, -55 to 150 degC, 3-Pin SOT23, RoHS, Tape and Reel", Case/Package=TO-236-3, Max Operating Temperature="150 degC", Min Operating Temperature="-55 degC", Package Quantity=1, ComponentLink1Description="Manufacturer URL", ComponentLink1URL=http://www.diodes.com/, ComponentLink2Description=Datasheet, ComponentLink2URL=http://www.diodes.com/_files/datasheets/DMG2305UX.pdf, DatasheetVersion="Rev. 5-2", Mount="Surface Mount", Mounting Technology="Surface Mount", PackageDescription="3-Pin Small Outline Transistor, Body 2.9 x 1.3 mm, Pitch 0.915 mm", Packaging="Tape and Reel", PartNumber=DMG2305UX-7, Pins=3, Radiation Hardening=No, RoHSCompliant=True
Q2: library part CMP-1667-00007-1, "Matched PNP Small Signal Surface Mount Transistor, 300 mW, -55 to 150 degC, 6-Pin SOT-26, RoHS, Tape and Reel", Case\Package=0603, Case Code (Metric)=1608, Max Operating Temperature="155 degC", Min Operating Temperature="-55 degC", Package Quantity=200, Power Rating="100 mW", Resistance="56.2 kohm", Tolerance=1%, Voltage Rating="50 V", Case Code (Imperial)=0603, ComponentLink1Description="Manufacturer URL", ComponentLink1URL=http://www.diodes.com/, ComponentLink2Description=Datasheet, ComponentLink2URL=http://www.diodes.com/_files/datasheets/ds30437.pdf, DatasheetVersion="Rev. 6-2, 05/2009", Height="0.45 mm", Length="1.6 mm", PackageDescription="6-Pin Small Outline Transistor, Body 1.6 x 3 mm, Pitch 0.95 mm", PackageReference=SOT-26-6, Packaging="Tape and Reel", RoHSCompliant=true, Width="0.8 mm"
Q3: library part CMP-1048-00699-1, "General Purpose Transistor, NPN Silicon, 3-Pin SOT-23, Pb-Free, Tape and Reel", Manufacturer="On Semiconductor", ComponentLink1Description="Manufacturer URL", ComponentLink1URL=http://www.onsemi.com/, ComponentLink2Description=Datasheet, ComponentLink2URL=http://www.onsemi.cn/pub_link/Collateral/BC846ALT1-D.PDF, ComponentLink3Description="Package Specification", ComponentLink3URL=http://www.onsemi.cn/pub_link/Collateral/318-08.PDF, DatasheetVersion="Rev. 11", fT Min (MHz)=100, IC Continuous (A)=0.1, Mounting Technology="Surface Mount", PackageDescription="3-Pin Small Outline Transistor, Body 2.92 x 1.3 mm, Pitch 0.95 mm", PackageReference=SOT-23-3-318-08, PackageVersion="Rev. AP, 11/2009", Packing="Tape and Reel", PartNumber=BC848ALT1G, Polarity=NPN, RoHS=TRUE
Q4: library part CMP-1259-00117-1, "Dual N-Channel Trench MOSFET, 60 V, 0.32 A, -55 to 150 degC, 6-Pin SOT363, Tape and Reel", Manufacturer="NXP Semiconductors", Automotive Qualified=Y, Channel Type=N, Code_JEITA=SC-88, ComponentLink1Description="Manufacturer URL", ComponentLink1URL=http://www.nxp.com/, ComponentLink2Description=Datasheet, ComponentLink2URL=http://www.nxp.com/documents/data_sheet/BSS138BKS.pdf, ComponentLink3Description="Package Specification", ComponentLink3URL=http://www.nxp.com/documents/outline_drawing/sot363_po.pdf, DatasheetVersion="Rev. 1", ID [max] (A)=0.32, IDM [max] (A)=1.2, Mounting Technology="Surface Mount", PackageDescription="6-Pin Small Outline Transistor Package, Body 2 x 1.25 mm, Pitch 0.65 mm", PackageReference=SOT363, PackageVersion="06-03-16, 03/2006", Packing="Tape & Reel", PartNumber=BSS138BKS,115, VDS [max] (V)=60, VGSth [typ] (V)=1.1
R1 R12 R13 R14 R15 R17 R19_SWITCH1 R19_SWITCH2 R19_SWITCH3 R20_SWITCH1 R20_SWITCH2 R20_SWITCH3: library part CMP-2000-07452-1, "Chip Resistor, 10 KOhm, +/- 1%, 0.1 W, -55 to 155 degC, 0603 (1608 Metric), RoHS, Tape and Reel", Case\/Package=0603, Case Code (Metric)=1608, Manufacturer=Panasonic, Max Operating Temperature=155degC, Max Power Dissipation=100mW, Min Operating Temperature=-55degC, Package Description="2-Pin Surface Mount Device, Body 1.6 x 0.85 mm", Package Quantity=1, Package Reference=603, Resistance=10KOhm, Temperature Coefficient=100ppm\/degreesC, Tolerance=1%, Voltage Rating=75V, Case Code (Imperial)=0603, Composition=ThickFilm, Contact Plating=Tin, Datasheet URL=https://industrial.panasonic.com/cdbs/www-data/pdf/RDA0000/AOA0000C304.pdf, Datasheet Version=02/2017, Depth=0.8mm, Height=0.45mm, Lead Free=LeadFree, Length=1.6mm, Manufacturer URL=http://www.panasonic.com/, Military Standard=Not, Mount=SurfaceMount, Mounting Technology=SurfaceMount, Number of Pins=2, Number of Terminations=2, Packaging=TapeandReel, Power Rating=100mW, Radiation Hardening=No, REACH SVHC=NoSVHC, RoHSCompliant=true, Termination=SMD/SMT, Voltage Rating (DC)=75V, Width=0.031inch
R2: library part CMP-2000-04844-1, Manufacturer=Yageo, Part Number=AC0603FR-0747KL
R3 R4 R5 R6 R7 R8 R9 R10 R16: library part CMP-2000-00180-1, Manufacturer=Panasonic, Part Number=ERJ-3EKF1001V
R11: library part CMP-1012-00473-1, "470R 0.1W 1% 0603 (1608 Metric)  SMD", Case-EIA=0603, Case-Metric=1608, Power="0.1 W", Tolerance="1 %", Technology=SMT
RPI1: library part "rpi connector", "GPIO Header for Raspberry Pi A+/B+/Pi 2/Pi 3 - 2x20", Manufacturer="SparkFun Electronics", Manufacturer Part Number=PRT-14017, Supplier Part Number 1=1568-1462-ND, Accessory Type=Connector, Category="Development Boards, Kits, Programmers", ComponentLink1Description=https://cdn.sparkfun.com/datasheets/Dev/RaspberryPi/12313.pdf, ComponentLink1URL=https://cdn.sparkfun.com/datasheets/Dev/RaspberryPi/12313.pdf, For Use With/Related Products="Raspberry Pi", Nils Minor=author, nilsminor@web.de=mail, Part Status=Active, Pricing 1="1=1.84 (EUR)", RoHS="RoHS Compliant", Stock 1=150, Supplier 1=Digi-Key
SWITCH_SWITCH1 SWITCH_SWITCH2 SWITCH_SWITCH3: library part CMP-1502-01783-1, "Serie 3211 - 3.50mm Vertical PCB Header WR-TBL, 2 pin", Manufacturer="Wurth Elektronik", Operating Temperature=-40to105degC, Package Reference=691321100002, Datasheet URL=http://katalog.we-online.de/em/datasheet/6913211000xx.pdf, Gender=Male, Manufacturer URL=http://www.we-online.de, Mounting Technology=THT, Packaging=Box, Part Number=691321100002, Pin Number=2, Pitch=3.50mm, Publisher=WurthElektronik
U1: library part CMP-2000-05370-1, "EEPROM Serial-I2C, 2Kbit, 2.5 to 5.5 V, 400 kHz, 8-Pin SO, -40 to 85 degC, RoHS, Tape and Reel", Frequency=0.4MHz, Manufacturer=STMicroelectronics, Operating Supply Voltage (Max)=5.5V, Operating Supply Voltage (Min)=2.5V, Operating Supply Voltage (Typ)=3.3/5V, Operating Temperature (Max)=85C, Operating Temperature (Min)=-40C, Operating Temperature Classification=Industrial, Operating Temp Range=-40Cto85C, Package Type=SOICN, Supply Current=2mA, Access Time (Max)=900ns, Data Retention=40, Datasheet URL=https://datasheet.ciiva.com/26870/m24c02-wmn6tp-26870257.pdf, Datasheet Version="Rev. 17, 04/2011", DELETED=Compliant, Density=2048Bit, Frequency (Max)=0.4MHz, Interface Type=Serial(I2C), Manufacturer URL=http://www.st.com/, Mounting=SurfaceMount, Organization=256x8, Packaging=TapeandReel, Pin Count=8, Programmable=Yes, Rad Hardened=No, Write Protection=Yes
U2: library part CMP-0188-00760-2, "12-Bit Digital-to-Analog Converter with EEPROM Memory in SOT-23-6, 6-Pin SOT-23, Extended Temperature, Tape and Reel", Code_IPC=SOT26A-6, ComponentLink1Description="Manufacturer URL", ComponentLink1URL=http://www.microchip.com/, ComponentLink2Description=Datasheet, ComponentLink2URL=http://ww1.microchip.com/downloads/en/DeviceDoc/22039d.pdf, ComponentLink3Description="Package Specification", ComponentLink3URL=http://www.microchip.com/stellent/groups/techpub_sg/documents/packagingspec/en012702.pdf, DatasheetVersion="revD, Jun-2009", PackageDescription="6-Lead Plastic Small Outline Transistor (CH) [SOT-23]", PackageReference=SOT-23-CH6, PackageVersion="revBB, Aug-2009", RevisionNote="URLs added."
U3: "DGTL ISO 2.5KV 2CH I2C 8SOIC", Case/Package=SOIC, Isolated Power=No, Manufacturer 1="Texas Instruments", Max Operating Temperature=125°C, Max Supply Voltage=5.5V, Min Operating Temperature=-40°C, Min Supply Voltage=3V, Nominal Supply Current=3.6mA, Package Quantity=1, Supplier Part Number 1=3124774, Working Voltage=566V, Channel Type=Bidirectional, ComponentLink1Description=https://datasheet.ciiva.com/6579/iso1540-6579723.pdf?src-supplier=Digi-Key, ComponentLink1URL=https://datasheet.ciiva.com/6579/iso1540-6579723.pdf?src-supplier=Digi-Key, ComponentLink2Description=https://datasheet.ciiva.com/6579/iso1540-6579724.pdf?src-supplier=Digi-Key, ComponentLink2URL=https://datasheet.ciiva.com/6579/iso1540-6579724.pdf?src-supplier=Digi-Key, ComponentLink3Description=https://datasheet.ciiva.com/6579/iso1540-6579725.pdf?src-supplier=Digi-Key, ComponentLink3URL=https://datasheet.ciiva.com/6579/iso1540-6579725.pdf?src-supplier=Digi-Key, ComponentLink4Description=https://datasheet.ciiva.com/14196/iso1540-14196749.pdf?src-supplier=Avnet, ComponentLink4URL=https://datasheet.ciiva.com/14196/iso1540-14196749.pdf?src-supplier=Avnet, Data Rate=1Mbps, Lead Free="Lead Free", Manufacturer Part Number 1=ISO1540DR, Mount="Surface Mount", Number of Channels=2, Number of Pins=8, Packaging="Tape and Reel", Pricing 1="1=4,68000, 10=3,77000, 25=3,54000, 50=3,32000, 100=3,09000, 250=2,89000, 500=2,21000 (EUR)", Propagation Delay=70ns, Pulse Width Distortion (PWD)=21ns, REACH SVHC="No SVHC", RoHS=Yes, Stock 1=2500, Supplier 1=Farnell
U4_SWITCH1 U4_SWITCH2 U4_SWITCH3: library part CMP-2000-07131-1, "Single Schmitt-Trigger Inverter Gate, 10.6 ns max, 2 to 5.5 V, -40 to 125 degC, 5-Pin SOT23 (DBV), Green (RoHS & no Sb/Br), Tape and Reel", Logic Case Style=SOT-23, Manufacturer="Texas Instruments", Operating Temperature Max=85°C, Operating Temperature Min=-40°C, Operating Temperature Range=-40°Cto+85°C, Output Current=8mA, Package Description="5-Pin Small Outline Transistor, Body 2.9 x 1.6 mm, Pitch 0.95 mm", Package Reference=DBV0005A, Supply Voltage=5.5V, Supply Voltage Min=2V, Supply Voltage Range=2Vto5.5V, Base Number=74, Datasheet URL=http://www.ti.com/lit/ds/symlink/sn74ahc1g14.pdf, Datasheet Version="Rev. Q, 09/2015", IC Generic Number=74AHC1G14, Logic Function Number=741G14, Logic IC Base Number=74114, Logic IC Family=AHC, Logic IC Function=SingleInverterwithSchmittTrigger, Logic Type=Inverter, Manufacturer URL=http://www.ti.com/, Mounting Technology=SurfaceMount, No. of Gates=1, No. of Inputs=1, No. of Pins=5, Output Current Max=8mA, Package / Case=SOT-23, Package URL=http://www.ti.com/lit/ml/mpds018l/mpds018l.pdf, Supply Voltage Max=5.5V, SVHC=NoSVHC(19-Dec-2012), Termination Type=SMD
UART1: library part CMP-2000-05165-1, "Male Header, Pitch 2 mm, 1 x 4 Position, Height 6 mm, Tail Length 3.4 mm, -25 to 85 degC, RoHS, Bulk", Manufacturer=JST, Datasheet URL=http://datasheet.octopart.com/B4B-PH-K-S%28LF%29%28SN%29-JST-datasheet-10558886.pdf, Datasheet Version=Apr-09, Manufacturer URL=http://www.jst.com/home2.html, No of Positions=4, Pitch=2mm, Style/Orientation=StraightHeader/Plug, Termination=Crimp, Type=ShroudedHeader

## Free pads (board coordinates)
  round 6 hole 3: ""(3.5,3.5) ""(3.5,52.5) ""(61.5,3.5) ""(61.5,52.5)

## Via types
v1: diameter 1, hole 0.35, Top Layer to Bottom Layer, 34 vias
v2: diameter 1, hole 0.5, Top Layer to Bottom Layer, 9 vias
v3: diameter 1.27, hole 0.711, Top Layer to Bottom Layer, 8 vias

## Nets (pads, with @x,y where several pads share a name; then routed paths per layer and width w, separated by ;. In a path a pad name is that pad's centre, name@x,y a point inside that pad or via, vN(x,y) a via of type N, cw(c..) or ccw(c..) an arc to the next point about the centre after c; other vN are vias at no path point)
+3V3: C2.1 C5.1 C7_SWITCH1.1 C7_SWITCH2.1 C7_SWITCH3.1 I/O1_I/O1.1 I/O1_I/O2.1 R4.2 R5.2 R6.2 R7.2 R8.2 R12.2 R14.2 R19_SWITCH1.2 R19_SWITCH2.2 R19_SWITCH3.2 RPI1.1 RPI1.17 U1.8 U3.1 U4_SWITCH1.5 U4_SWITCH2.5 U4_SWITCH3.5 | length 166.5
  Top Layer w0.17: v1(31.805,45.905) v1@32,45.905 ; R6.2 R5.2@33.97,47.875 ; R4.2 37.4,46.205 v1(37.4,47.7)
  Top Layer w0.203: v1(40.8,47.2) 41.2,47.2 41.25,47.25 R12.2 R14.2 ; U4_SWITCH1.5 48.65,29.95 49.45,29.95 50.177,29.223 50.177,28.598 C7_SWITCH1.1 R19_SWITCH1.2 ; R19_SWITCH3.2 49.375,13.6 C7_SWITCH3.1 ; R19_SWITCH2.2 C7_SWITCH2.1 49.723,23.473 50.348,23.473 51.075,24.2 51.075,25 U4_SWITCH2.5 ; C7_SWITCH3.1@49.387,13.625 C7_SWITCH3.1 ; U4_SWITCH3.5 51.125,15.425 50.375,14.675 50.375,14.55 49.45,13.625 C7_SWITCH3.1
  Top Layer w0.254: C2.1@31.895,41.985 32.776,41.985 33.724,42.933 33.724,44.069 33.856,44.201 33.856,45.921 R6.2@34.07,46.135
  Top Layer w0.305: RPI1.17 29.07,51.23 31.805,48.495 v1(31.805,45.905) 31.895,45.815 C2.1 C2.1@31.895,41.985
  Top Layer w0.381: U3.1 17.44,21.715 17.44,23.585 C5.1 17.425,23.925 18.465,24.965 18.465,25.44 R8.2 R7.2 v1(23.9,26.9) 47.812,26.9 v1@48.1,26.612 ; C7_SWITCH3.1@49.387,13.625 48.475,13.625 48.1,14 48.1,22.7 48.6,23.2 48.1,23.7 v1@48.1,26.612 ; C7_SWITCH1.1@50.278,28.003 50.278,27.278 49.85,26.85 48.338,26.85 v1@48.1,26.612 ; v1(51.1,35) 60.1,35 60.4,34.7 I/O1_I/O2.1
  Top Layer w0.406: 48.6,23.2 49.3,23.2 C7_SWITCH2.1 ; C7_SWITCH1.1@50.278,28.003 C7_SWITCH1.1 ; I/O1_I/O2.1 62.5,34.2 63.4,35.1 63.4,45.4 62.3,46.5 I/O1_I/O1.1
  Bottom Layer w0.17: v1(31.805,45.905) 36.95,45.905 37.4,46.355 v1(37.4,47.7)
  Bottom Layer w0.203: v1(37.4,47.7) 40.162,47.7 40.662,47.2 v1(40.8,47.2)
  Bottom Layer w0.381: v1(23.9,26.9) 24.5,26.9 25.4,27.8 25.4,47.94 RPI1.17 ; v1(47.956,26.756) 49.8,28.6 49.8,33.7 v1(51.1,35)
+5V: D1.1 DS2.1 K1.5 Q1.2 Q2.5 R3.2 RPI1.2 RPI1.4 | length 45.4
  Top Layer w0.254: Q1.2@24.675,41.175 Q1.2@24.865,41.175
  Top Layer w0.381: D1.1 43.45,35.3 45.079,33.672 45.079,32.592 K1.5
  Top Layer w0.406: DS2.1 v1(45.27,25.53)
  Bottom Layer w0.406: v1(26.9,43.9) 26.9,30.5 31.87,25.53 DS2.1 ; v1(45.27,25.53) K1.5
DAC_OUT: SWITCH.1 U2.1 | length 3.9
  Top Layer w0.203: SWITCH.1 4.85,15.54 U2.1
GND: C1.2 C2.2 C5.2 C7_SWITCH1.2 C7_SWITCH2.2 C7_SWITCH3.2 C8_SWITCH1.2 C8_SWITCH2.2 C8_SWITCH3.2 DS1.2 I/O1_I/O1.3 I/O1_I/O2.3 P1.1 P2.1 Q3.2 R1.1 R2.1 R17.1 RPI1.6 RPI1.9 RPI1.14 RPI1.20 RPI1.25 RPI1.30 RPI1.34 RPI1.39 SWITCH_SWITCH1.2 SWITCH_SWITCH2.2 SWITCH_SWITCH3.2 U1.1 U1.2 U1.3 U1.4 U3.4 U4_SWITCH1.3 U4_SWITCH2.3 U4_SWITCH3.3 UART1.1 | length 27.4
  Top Layer w0.203: C5.2 v1(20.1,23.6) ; R17.1 37.25,35.8 v1(38.4,35.8) ; v1(47.85,28.561) 48.161,28.25 C7_SWITCH1.2 ; v1(49.375,16.3) 49.375,15 C7_SWITCH3.2 ; C7_SWITCH2.2 49.5,24.6 v1(49.5,25.8) ; U4_SWITCH1.3 v1(51.15,33.35) ; C8_SWITCH3.2 52.9,10 v1(54.5,10) ; C8_SWITCH2.2 53.05,19.7 53.169,19.581 v1(54.187,19.581) ; U4_SWITCH3.3 v1(54.475,13) ; U4_SWITCH2.3 53.025,22.527 53.198,22.7 v1(53.875,22.7) ; C8_SWITCH1.2 54.15,31.775 v1(54.15,33.375)
  Top Layer w0.254: P1.1@4.475,37.775 P1.1@4.525,37.775 ; v1(13.45,23.3) 13.45,22.652 U3.4@13.725,22.377 ; C1.2@16.452,36.15 17.325,35.277 C1.2@17.325,34.6 ; R2.1@23.05,36.75 R2.1@23.2,36.9
  Top Layer w0.381: v1(30.65,33.6) Q3.2 ; C2.2 v1(31.895,39.275) 31.96,39.275 32.685,38.55 U1.1 U1.2 U1.3 U1.4
  Bottom Layer w0.203: v1(54.15,33.375) v1@54.15,33.45 ; v1(54.5,10) v1@54.575,10
  other v3: 19.6,32.4 21.2,32.4 19.6,34 21.2,34 19.6,35.6 21.2,35.6 19.6,37.2 21.2,37.2
GPIO4: R11.1 RPI1.7 | length 30
  Top Layer w0.254: RPI1.7 17.32,49.9 28.8,49.9 30.1,48.6 v1(30.1,45) ; v1(30.8,35.7) 31.8,35.7 32,35.9 R11.1
  Bottom Layer w0.254: v1(30.1,45) 30.1,36.4 v1(30.8,35.7)
GPIO5: RPI1.29
GPIO6: RPI1.31
GPIO7: RPI1.26
GPIO8: RPI1.24
GPIO9: RPI1.21
GPIO10: RPI1.19
GPIO11: RPI1.23
GPIO12: RPI1.32
GPIO13: RPI1.33
GPIO17: RPI1.11
GPIO18: RPI1.12
GPIO22: RPI1.15
GPIO23: RPI1.16
GPIO24: RPI1.18
GPIO25: RPI1.22
GPIO27: RPI1.13
"I2C SCL": R7.1 RPI1.5 U3.3 | length 34.7
  Top Layer w0.203: U3.3 14.9,21.715 14.9,26.2 v1(16,27.3) 16.2,27.3 16.6,26.9 R7.1
  Bottom Layer w0.203: RPI1.5 11.4,49.18 11.4,31.2 15.3,27.3 v1(16,27.3)
"I2C SDA": R8.1 RPI1.3 U3.2 | length 32.9
  Top Layer w0.203: U3.2 16.193,21.707 v1(16.193,25.608) 17.367,25.608 R8.1
  Bottom Layer w0.203: RPI1.3 10.91,30.89 v1(16.193,25.608)
I/O1: I/O1_I/O1.2 RPI1.36 | length 15.6
  Top Layer w0.254: RPI1.36 52.82,52.5 54.8,52.5 55.4,51.9 55.4,48 I/O1_I/O1.2
I/O2: I/O1_I/O2.2 RPI1.37 | length 23.6
  Top Layer w0.254: RPI1.37 54.7,50.62 v1(54.7,47)
  Bottom Layer w0.254: v1(54.7,47) 54.7,35.7 59.7,30.7 I/O1_I/O2.2
ID_SC: R5.1 RPI1.28 U1.6 | length 13.4
  Top Layer w0.178: U1.6@36.33,44.135 36.33,46.89 35.42,47.8 35.42,47.875 35.42,47.95 37.232,49.762 38.855,49.762 40.2,51.106 40.2,52.58 RPI1.28
ID_SD: R4.1 RPI1.27 U1.5 | length 8.9
  Top Layer w0.178: U1.5@37.6,44.135 37.6,44.535 37.795,44.73 38.167,44.73 38.82,45.383 R4.1 38.82,48.66 RPI1.27
ISO_GND: C3.2 C4.1 C6.2 PEDAL.1 TABLE.1 U2.2 U2.6 U3.5 | length 10.5
  Top Layer w0.203: v2(1.1,8.7) 1.1,8.9 1.15,8.95 C6.2 ; U2.2 4.123,11.767 4.123,11.042 4.627,10.539 4.627,9.814 U2.6 v2(6.19,9.59) ; U3.5 13.645,14.855 v2(13.8,14.7) ; C4.1 C3.2 19.223,14.848 19.223,15.623 v1(19.5,15.9)
ISO_VCC: C3.1 C4.2 C6.1 PEDAL.3 R9.2 R10.2 TABLE.3 U2.3 U3.8 | length 53.1
  Top Layer w0.203: v2(1.1,13) 1.15,12.95 C6.1 1.452,11.767 2.727,11.767 U2.3 ; v2(6.625,11.425) R10.2
  Top Layer w0.254: R10.2 R9.2 9.431,11.294 10.106,11.294 11.1,10.3 11.1,6.134 9.966,5 TABLE.3
  Top Layer w0.381: U3.8 17.49,16.265 17.49,14.535 C3.1 C4.2 17.525,10.265 PEDAL.3
  Top Layer w2: TABLE.3 9.985,4.481 9.985,2.672 11.056,1.6 22.4,1.6 23.29,2.49 PEDAL.3
  Bottom Layer w0.203: v2(1.1,13) 5,13 6.575,11.425 v2(6.625,11.425)
NetC1_1: C1.1 P1.2 Q1.3 Q2.6 | length 6.1
  Top Layer w0.17: Q1.3 25.5,40.3 26.435,41.235 27.835,41.235 28.05,41.45 Q2.6
NetC8_SWITCH1_1: C8_SWITCH1.1 R20_SWITCH1.1 U4_SWITCH1.2 | length 3.8
  Top Layer w0.254: U4_SWITCH1.2 52.025,30.95 52.775,31.7 C8_SWITCH1.1 52.8,31.725 R20_SWITCH1.1
NetC8_SWITCH2_1: C8_SWITCH2.1 R20_SWITCH2.1 U4_SWITCH2.2 | length 3.8
  Top Layer w0.254: R20_SWITCH2.1 52.85,20.85 C8_SWITCH2.1 52.825,20.875 52.075,21.625 U4_SWITCH2.2
NetC8_SWITCH3_1: C8_SWITCH3.1 R20_SWITCH3.1 U4_SWITCH3.2 | length 3.8
  Top Layer w0.254: R20_SWITCH3.1 52.85,11.35 C8_SWITCH3.1 52.825,11.375 52.075,12.125 U4_SWITCH3.2
NetD1_2: D1.2 K1.1 Q3.3 R16.1 | length 11.6
  Top Layer w0.254: R16.1 32.275,30.975 32.85,31.55 Q3.3
  Top Layer w0.381: Q3.3 36.85,31.6 K1.1 38.46,33.21 38.46,34.01 39.75,35.3 D1.2
NetDS1_1: DS1.1 R3.1 | length 2.3
  Top Layer w0.178: DS1.1 3.87,46.1 5.825,46.1 R3.1
NetDS2_2: DS2.2 R16.2 | length 2.1
  Top Layer w0.203: DS2.2 32.9,28.241 33.525,28.866 R16.2
NetP2_2: P2.2 R6.1 U1.7 | length 7.8
  Top Layer w0.178: R6.1@35.32,46.135 35.06,45.875 35.06,44.135 35.06,43.61 36.095,42.575 39.795,42.575
NetQ1_1: Q1.1 Q2.4 R2.2 | length 9.4
  Top Layer w0.18: R2.2 24.56,37.11 24.56,38.575 24.7,38.715 Q1.1 25.885,39.385 27,40.5 29.8,40.5 29.95,40.65 Q2.4
NetQ2_1: Q2.1 Q2.2 Q2.3 R1.2 | length 7.8
  Top Layer w0.17: R1.2@24.35,34.65 27.877,38.177 Q2.1@27.877,38.752
  Top Layer w0.254: R1.2 R1.2@24.35,34.65 ; Q2.1@27.877,38.752 Q2.1 Q2.2 Q2.3
NetQ3_1: Q3.1 R11.2 R17.2 | length 4.1
  Top Layer w0.254: Q3.1 33.775,33.625 33.775,35.475 34.1,35.8 35.75,35.8 R17.2
NetR9_1: R9.1 U2.4 U3.7 | length 24.7
  Top Layer w0.203: U2.4 2.95,8.95 4.1,7.8 6.9,7.8 7.2,7.5 9.4,7.5 v2(9.6,7.3) 9.6,9.475 9.116,9.959 9.3,10.142 9.267,10.175 R9.1 ; v2(15.7,10.3) 16.185,10.785 U3.7
  Bottom Layer w0.203: v2(9.6,7.3) 11.4,7.3 14.4,10.3 v2(15.7,10.3)
NetR10_1: R10.1 U2.5 U3.6 | length 19.3
  Top Layer w0.203: U2.5 3.9,9 4.5,8.4 6.8,8.4 7.1,8.7 v2(8,8.7) R10.1 ; v2(14.868,11.932) 14.892,11.955 14.892,16.277 U3.6
  Bottom Layer w0.203: v2(8,8.7) 11.9,8.7 14.868,11.668 v2(14.868,11.932)
NetR19_SWITCH1_1: R19_SWITCH1.1 R20_SWITCH1.2 SWITCH_SWITCH1.1 | length 12.4
  Top Layer w0.254: R20_SWITCH1.2@53.852,29.652 54.1,29.9 R20_SWITCH1.2 R19_SWITCH1.1 54.1,25.9 58.1,21.9 SWITCH_SWITCH1.1
NetR19_SWITCH2_1: R19_SWITCH2.1 R20_SWITCH2.2 SWITCH_SWITCH2.1 | length 13.7
  Top Layer w0.254: R19_SWITCH2.1 51.125,19.55 56.552,14.123 59.477,14.123 SWITCH_SWITCH2.1
NetR19_SWITCH3_1: R19_SWITCH3.1 R20_SWITCH3.2 SWITCH_SWITCH3.1 | length 8.5
  Top Layer w0.254: R19_SWITCH3.1 R20_SWITCH3.2 51.075,8.275 SWITCH_SWITCH3.1
RELAY_CM: K1.2 RELAY.2 | length 18.9
  Top Layer w2: K1.2 41,18.89 RELAY.2
RELAY_NC: K1.4 RELAY.1 | length 12.8
  Top Layer w2: RELAY.1 44.5,16.39 K1.4
RELAY_NO: K1.3 RELAY.3 | length 10
  Top Layer w2: RELAY.3 37.5,14.47 K1.3
RX: Q4.1 Q4.2 R12.1 RPI1.10 | length 38.3
  Top Layer w0.203: R12.1 42.25,48.55 R12.1@42.523,48.823 ; v1(42.6,52.7) 42.6,48.9 43.336,49.636 48.27,49.636 49.945,47.961 50.414,47.961 Q4.2 Q4.1
  Bottom Layer w0.203: RPI1.10 19.585,52.715 42.585,52.715 v1(42.6,52.7)
SWITCH1: RPI1.35 U4_SWITCH1.4 | length 20.8
  Top Layer w0.254: U4_SWITCH1.4 48.6,39.74 51.8,42.94 51.8,50.98 RPI1.35
SWITCH2: RPI1.38 U4_SWITCH2.4 | length 29.3
  Top Layer w0.254: v1(53,26.5) 53.012,26.488 53.012,25.063 U4_SWITCH2.4
  Bottom Layer w0.254: v1(53,26.5) 52.8,26.7 52.8,52.48 RPI1.38
SWITCH3: RPI1.40 U4_SWITCH3.4 | length 42.3
  Top Layer w0.254: v1(52.1,16.7) 52.1,16.6 53.025,15.675 U4_SWITCH3.4
  Bottom Layer w0.254: v1(52.1,16.7) 53,16.7 55.2,18.9 55.2,33.9 53.6,35.5 53.6,48 55.4,49.8 55.4,52.54 RPI1.40
TX: Q4.4 Q4.5 R14.1 RPI1.8 | length 40.8
  Top Layer w0.203: R14.1 43.8,48.9 44.13,49.23 46.37,49.23 47.7,47.9 Q4.5 Q4.4
  Bottom Layer w0.203: RPI1.8 17.475,52.285 41.827,52.285 42.217,51.895 43.097,51.895 43.487,52.285 44.367,52.285 45.1,51.552 45.1,51.108 47.1,49.108 v1(47.1,48.3)
UART_RX_HS: Q4.6 R13.2 UART1.3 | length 9.1
  Top Layer w0.203: v1(45.8,45.8) 45.8,46.95 R13.2 Q4.6
  Bottom Layer w0.203: UART1.3 45.8,43.95 v1(45.8,45.8)
UART_TX_HS: Q4.3 R15.1 UART1.2 | length 13.1
  Top Layer w0.203: UART1.2 44.155,40.305 45.005,40.305 50.15,45.45 R15.1 50.9,45.5 51.3,45.9 51.3,48.3 51.05,48.55 Q4.3
UART_VCC_HS: R13.1 R15.2 UART1.4 | length 10.6
  Top Layer w0.203: R13.1 45.45,48.55 44.687,47.787 44.687,44.854 43.95,44.117 UART1.4 47.5,44.1 48.85,45.45 R15.2
VTableCtrl: SWITCH.2 TABLE.2 | length 19.4
  Top Layer w0.381: v1(11.2,13.8) 11.2,12.1 13.776,9.524 TABLE.2
  Bottom Layer w0.381: SWITCH.2 5.1,19.6 10.9,13.8 v1(11.2,13.8)
VTablePedal: PEDAL.2 SWITCH.3 | length 30.7
  Bottom Layer w0.254: SWITCH.3 9.424,18.586 9.424,17.901 14.564,12.762 18.838,12.762 PEDAL.2
pads on no net: U4_SWITCH1.1 U4_SWITCH2.1 U4_SWITCH3.1
copper on no net: | length 0.1
  Bottom Layer w0.254: 23.1,31.1 23.2,31

## Polygon pours and split planes (outlines as drawn)
GND on Top Layer "GND_L01_P050" (solid, pour order 50): 9.9,27.9 11.8,26 11.8,21.3 12.3,20.8 23.2,20.8 27.4,25 47.7,25 48.5,24.2 48.5,-0.2 65.1,-0.2 65.1,55.9 65,56 -0.2,56 -0.2,31.3 0.4,30.7 9.9,30.7
+5V on Top Layer "+5V_L01_P026" (solid, pour order 26): 29.2,40.5 29.5,40.8 29.5,47.1 29,47.6 12.5,47.6 12.2,47.9 12.2,56.1 0.2,56.1 0.055,55.955 0.055,48.024 5.424,48.024 6.076,48.024 6.5,47.6 6.5,44.5 21.5,44.5 23.7,42.3 23.7,40.8 24,40.5
NetC1_1 on Top Layer "NETC1_1_L01_P018" (solid, pour order 18): 0.2,44 21.1,44 23,42.1 23,38.5 14.8,38.5 13.3,40 13.1,39.8 0.2,39.8
no net on Top Layer "NONET_L01_P036" (solid, pour order 36): 53.7,45.85
no net on Top Layer "NONET_L01_P034" (solid, pour order 34): 51.4,28.5
no net on Top Layer "NONET_L01_P032" (solid, pour order 32): 53.9,28.3
no net on Top Layer "NONET_L01_P028" (solid, pour order 28): 29.5,40.5
no net on Top Layer "NONET_L01_P024" (solid, pour order 24): 27.45,40.55
no net on Top Layer "NONET_L01_P022" (solid, pour order 22): 23.7,40.3
no net on Top Layer "NONET_L01_P014" (solid, pour order 14): 0.325,39.562
no net on Top Layer "NONET_L01_P010" (solid, pour order 10): 12.4,37.8
no net on Top Layer "NONET_L01_P008" (solid, pour order 8): 9.2,35.8
no net on Top Layer "NONET_L01_P006" (solid, pour order 6): 8.8,34.8
no net on Top Layer "NONET_L01_P002" (solid, pour order 2): -0.05,39.525
GND on Bottom Layer "GND_L02_P044" (solid, pour order 44): 9.9,27.9 11.8,26 11.8,21.3 12.3,20.8 23.1,20.8 27.4,25.1 47.7,25.1 48.5,24.3 48.5,-0.1 65.1,-0.1 65.1,56 65,56.1 -0.2,56.1 -0.2,31.4 0.4,30.8 9.9,30.8
ISO_GND on Bottom Layer "ISO_GND_L02_P042" (solid, pour order 42): 32.3,7.603 32.708,7.2 32.708,0.203 8.208,0.203 8.108,0.103 8.108,7.303 0.208,7.303 0.208,26.503 7.7,26.503 7.908,26.3 7.908,21.992 12.597,17.303 20.5,17.303 20.9,16.903 20.908,12.803 26.108,7.603

## Silkscreen, mask and mechanical layers (free items; w line width, h text height)
Top Overlay:
  lines w0.254: 0.1,31.1 23.1,31.1 ; 23.2,31 23.2,14.1 23.3,14 34.1,14 34.1,2.3 34.1,0
  text "1" at 8.265,48.02 h0.89 r90
  text "ProtoSpace 2019" at 8.7,46.1 h1.4
  text "3.3V" at 56.9,45.9 h0.8 r90
  text "+" at 47.2,43.7 h0.8
  text "RX" at 47.2,41.7 h0.8
  text "GPIO1" at 56.2,41.1 h1 r90
  text "+5V" at 7.95,40.6 h1.52
  text "TX" at 47.2,39.656 h0.8
  text "GND" at 56.9,38.3 h0.8 r90
  text "GND" at 47.2,37.6 h0.8
  text "GND" at 8.1,36.975 h1.52
  text "3.3V" at 56.9,33.5 h0.8 r90
  text "GPIO2" at 56.2,28.4 h1 r90
  text "GND" at 56.9,25.7 h0.8 r90
  text "FOOT" at 8.1,22.9 h1
  text "OUT" at 8.1,19 h1
  text "SW1" at 57,18.9 h1 r90
  text "Changing Melodies / PI Shield V2.0" at 29.6,17.6 h1.2 r90
  text "DAC" at 8.1,15.2 h1
  text "a" at 23.8,14.4 h3
  text "SW2" at 57,10.5 h1 r90
  text "H" at 35.2,9.2 h3
  text "+" at 9.6,8 h1
  text "Ctrl" at 12.2,8 h1
  text "-" at 17.2,8 h1
  text "+" at 22.9,8 h1
  text "FOOT" at 25.25,8 h1
  text "-" at 30.5,8 h1
  text "NO" at 36.7,8 h1
  text "COM" at 39.7,8 h1
  text "NC" at 43.7,8 h1
  text "SW3" at 51.4,8 h1
Bottom Overlay:
  circle w0.5: c7.75,49.25 r0.25
M2: Outline:
  the board outline again, w0.254

## Text inside footprints (layer, text, board x,y; h text height)
K1: Top Overlay ">" at 39.51,14.14 h1; Top Overlay ">" at 43.535,15.12 h1 r180